# EAGLE board interface_board (EAGLE 6.3)
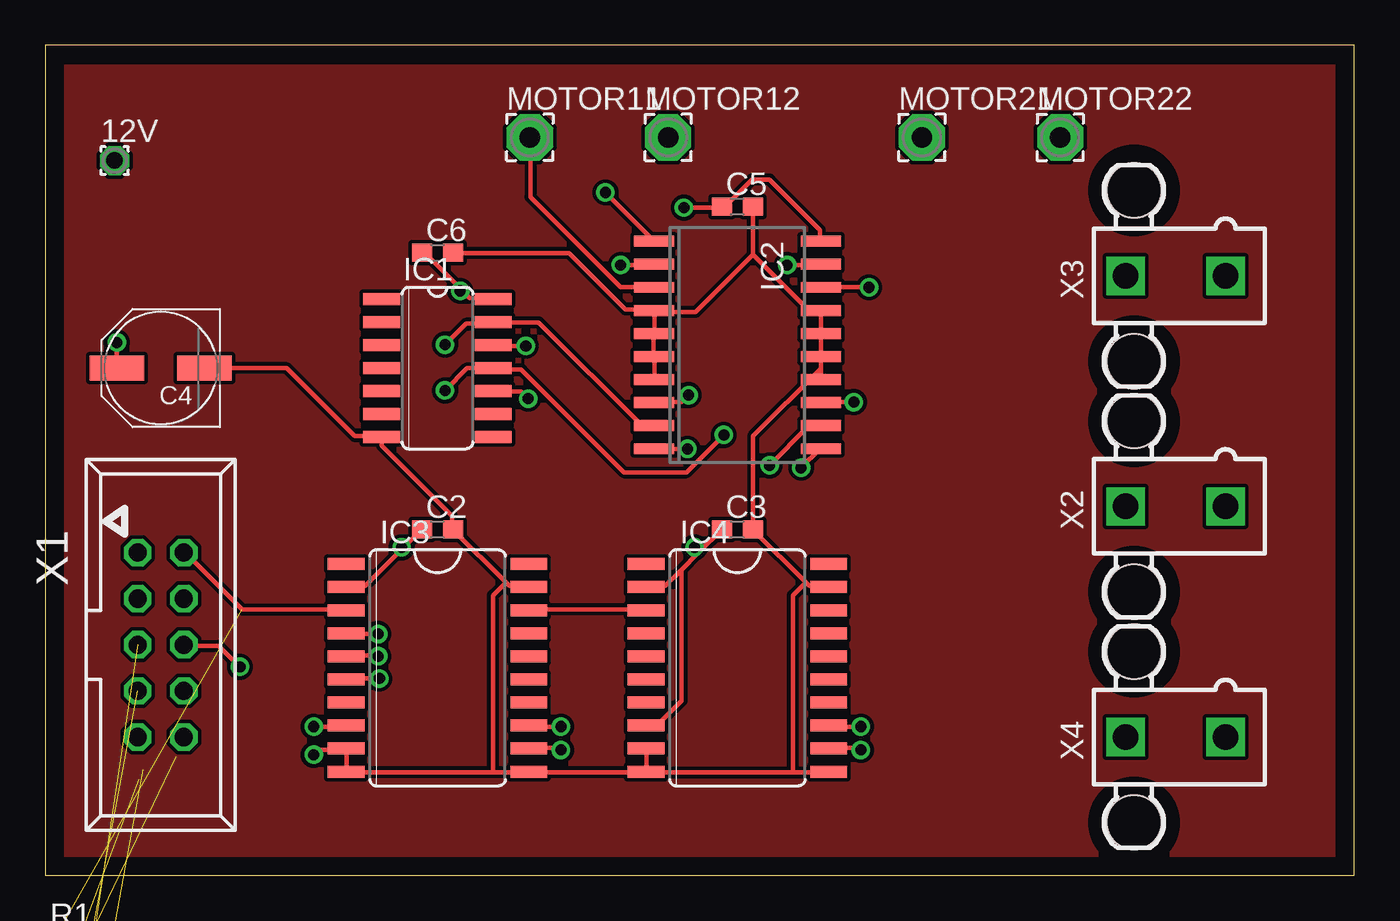
[diagram p0: board, top side]
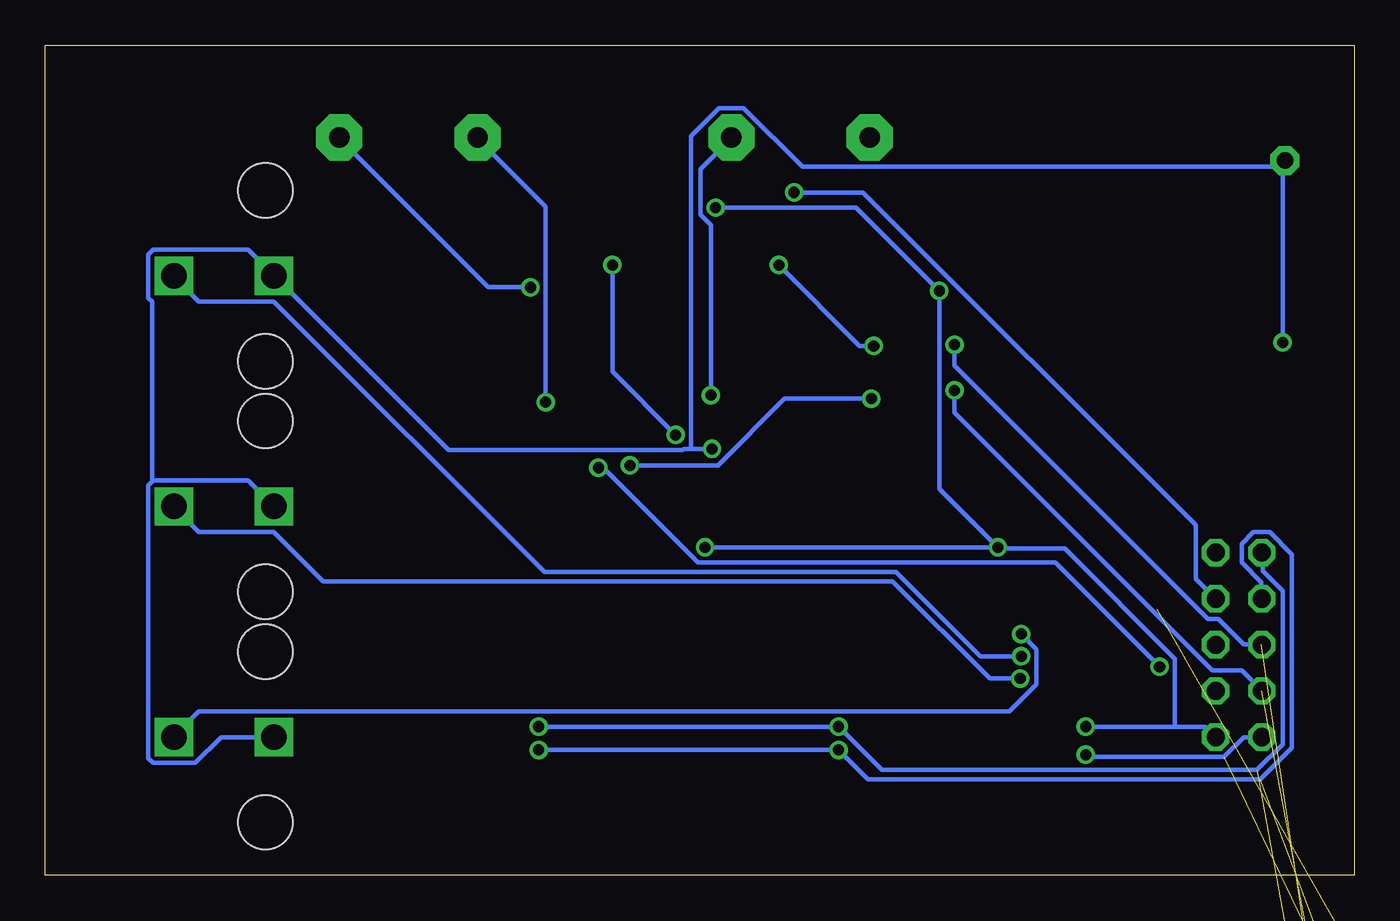
[diagram p1: board, bottom side, seen from below]

Size 72.06 x 45.71 mm. Coordinates in mm from the lower left corner, seen from the top.
Outline: 0,0 72.06,0 72.06,45.71 0,45.71 0,0
Copper layers (1*16): Top 0.035mm / dielectric 1.5mm / Bottom 0.035mm
Design rules "default": minimum track width 10mil, minimum drill 24mil, track to track 8mil, track to pad 8mil, pad to pad 8mil, via to via 8mil, smd to smd 8mil, copper to edge 40mil, drill to drill 8mil, minimum pad ring 10mil, minimum via ring 8mil, stop-mask expansion 4mil, vias tented up to drill 0mil, thermal gap 10mil

## Footprints (pad centres in the part's own frame; a part is rotated, then mirrored left to right if it is on the bottom)
1,6/0,9 = drill 0.914 pad 1.6 octagon: 1 0,0
C0603 = smd 1.1 x 1: 1 -0.85,0; 2 0.85,0
PANASONIC_D = smd 3 x 1.4: + 2.4,0; - -2.4,0
SO14 = smd 0.66 x 2.032: 1 -3.81,-3.073; 2 -2.54,-3.073; 3 -1.27,-3.073; 4 0,-3.073; 5 1.27,-3.073; 6 2.54,-3.073; 7 3.81,-3.073; 8 3.81,3.073; 9 2.54,3.073; 10 1.27,3.073; 11 0,3.073; 12 -1.27,3.073; 13 -2.54,3.073; 14 -3.81,3.073
SO20 = smd 0.6 x 2.2: 1 -5.715,-4.6; 2 -4.445,-4.6; 3 -3.175,-4.6; 4 -1.905,-4.6; 5 -0.635,-4.6; 6 0.635,-4.6; 7 1.905,-4.6; 8 3.175,-4.6; 9 4.445,-4.6; 10 5.715,-4.6; 11 5.715,4.6; 12 4.445,4.6; 13 3.175,4.6; 14 1.905,4.6; 15 0.635,4.6; 16 -0.635,4.6; 17 -1.905,4.6; 18 -3.175,4.6; 19 -4.445,4.6; 20 -5.715,4.6
SO20W = smd 0.66 x 2.032: 1 -5.715,-5.029; 2 -4.445,-5.029; 3 -3.175,-5.029; 4 -1.905,-5.029; 5 -0.635,-5.029; 6 0.635,-5.029; 7 1.905,-5.029; 8 3.175,-5.029; 9 4.445,-5.029; 10 5.715,-5.029; 11 5.715,5.029; 12 4.445,5.029; 13 3.175,5.029; 14 1.905,5.029; 15 0.635,5.029; 16 -0.635,5.029; 17 -1.905,5.029; 18 -3.175,5.029; 19 -4.445,5.029; 20 -5.715,5.029
2,54/1,1 = drill 1.118 pad 2.54 octagon: 1 0,0
M0805 = smd 1.3 x 1.6: 1 -0.95,0; 2 0.95,0
057-010-1 = drill 1 octagon: 1 -5.08,-1.27; 2 -5.08,1.27; 3 -2.54,-1.27; 4 -2.54,1.27; 5 0,-1.27; 6 0,1.27; 7 2.54,-1.27; 8 2.54,1.27; 9 5.08,-1.27; 10 5.08,1.27
5566-2 = drill 1.4 square: 1 0,-2.75; 2 0,2.75 | hole 3: 4.7,2.29; -4.7,2.29

## Placement (x,y rotation side)
12V  [1,6/0,9]  3.81,39.37 0 top
C2  100nF  [C0603]  21.59,19.05 0 top
C3  100nF  [C0603]  38.1,19.05 0 top
C4  100uF  [PANASONIC_D]  6.35,27.94 180 top
C5  100nF  [C0603]  38.1,36.83 0 top
C6  100nF  [C0603]  21.59,34.29 0 top
IC1  74HCT14D  [SO14]  21.59,27.94 270 top
IC2  L293DD  [SO20]  38.1,29.21 270 top
IC3  TPIC6B596DW  [SO20W]  21.59,11.43 270 top
IC4  TPIC6B596DW  [SO20W]  38.1,11.43 270 top
MOTOR11  [2,54/1,1]  26.67,40.64 0 top
MOTOR12  [2,54/1,1]  34.29,40.64 0 top
MOTOR21  [2,54/1,1]  48.26,40.64 0 top
MOTOR22  [2,54/1,1]  55.88,40.64 0 top
R1  10k  [M0805]  1.27,-3.81 0 top  (outside the outline)
R2  10k  [M0805]  1.27,-7.62 0 top  (outside the outline)
R3  10k  [M0805]  1.27,-11.43 0 top  (outside the outline)
R4  10k  [M0805]  1.27,-15.24 0 top  (outside the outline)
R5  10k  [M0805]  1.27,-19.05 0 top  (outside the outline)
X1  057-010-1  [057-010-1]  6.35,12.7 270 top
X2  5566-2  [5566-2]  62.23,20.32 90 top
X3  5566-2  [5566-2]  62.23,33.02 90 top
X4  5566-2  [5566-2]  62.23,7.62 90 top

## Library data of the parts
12V MOTOR11 MOTOR12 MOTOR21 MOTOR22 = wirepad
C2-C6 = rcl
IC1 = 74xx-eu
IC2 = st-microelectronics; OC_FARNELL: unknown
IC3 IC4 = tpic
R1-R5 = resistor
X1 = con-panduit; OC_FARNELL: unknown; OC_NEWARK: unknown
X2-X4 = con-molex; OC_FARNELL: 1822072; OC_NEWARK: unknown

## Nets
+5V: C2.1 C3.1 C5.1 C6.1 IC1.14 IC2.20 IC3.2 IC3.8 IC4.2 IC4.8 X1.10
+12V: 12V.1 C4.+ IC2.10 X2.2 X3.2 X4.2
GND: C2.2 C3.2 C4.- C5.2 C6.2 IC1.7 IC2.4 IC2.5 IC2.6 IC2.7 IC2.14 IC2.15 IC2.16 IC2.17 IC3.9 IC3.10 IC3.11 IC3.19 IC4.9 IC4.10 IC4.11 IC4.19 R1.2 R2.2 R3.1 R4.2 R5.2 X1.9
N$1: IC1.13 IC2.9 R5.1 X1.5
N$2: IC3.4 X4.1
N$3: IC2.18 MOTOR22.1
N$5: IC2.1 X1.4
N$6: IC2.11 X1.6
N$7: IC2.13 MOTOR21.1
N$8: IC1.12 IC2.2
N$9: IC1.10 IC2.12
N$10: IC2.8 MOTOR12.1
N$11: IC3.5 X3.1
N$12: IC2.3 MOTOR11.1
N$13: IC3.6 X2.1
N$14: IC1.11 IC2.19 R4.1 X1.7
N$15: IC3.18 IC4.3
N$16: IC3.3 R1.1 X1.2
N$18: IC3.12 IC4.12 R2.1 X1.3
N$19: IC3.13 IC4.13 R3.2 X1.1

## Tracks (layer width: path | path; a pad name or v marks a point on that pad's centre or on a via)
+5V  (via drill 0.61)
  Top 0.254: 34.97,16.77 34.13,15.94 33.1,15.94 IC4.2 | 34.97,16.77 36,17.81 | 36,17.81 37.23,19.03 C3.1 | IC4.8 33.1,8.26 33.68,8.26 35.03,9.61 35.03,16.71 34.97,16.77 | v14.77,8.19 16.52,8.19 IC3.8 | IC2.20 42.65,34.97 42.65,35.55 39.87,38.32 38.9,38.32 37.42,36.84 37.29,36.84 C5.1 37.16,36.77 v35.16,36.77 | 22.9,32.26 23.36,31.81 24.64,31.81 IC1.14 | 22.9,32.26 20.9,34.26 20.77,34.26 C6.1 | 19.68,18 17.61,15.94 16.58,15.94 IC3.2 | 19.68,18 20.71,19.03 C2.1 | v22.84,32.19 22.9,32.26 | v19.61,18.06 19.68,18 | v35.74,18.06 35.94,17.87 36,17.81
  Bottom 0.254: 9.87,8.19 8.19,8.19 X1.10 | 9.87,8.19 v14.77,8.19 | v19.61,18.06 22.84,21.29 v22.84,32.19 22.9,32.26 27.42,36.77 v35.16,36.77 | 9.87,8.19 9.87,11.94 15.94,18 19.55,18 v19.61,18.06 | v19.61,18.06 v35.74,18.06
+12V  (via drill 0.61)
  Top 0.254: v3.94,29.36 3.94,28 C4.+ | v35.35,23.48 33.55,23.48 IC2.10
  Bottom 0.254: 66.13,21.74 66.39,21.48 66.39,6.45 66.13,6.19 63.81,6.19 62.39,7.61 X4.2 | 66.13,21.74 60.9,21.74 X2.2 | v3.94,29.36 3.94,39.29 3.87,39.35 12V.1 4,39.03 30.39,39.03 33.61,42.26 34.97,42.26 36.52,40.71 36.52,23.48 | 36.52,23.48 36.9,23.48 36.97,23.42 49.87,23.42 59.42,32.97 X3.2 59.55,33.1 60.9,34.45 66.13,34.45 66.39,34.19 66.39,31.81 66.19,31.61 66.19,21.81 66.13,21.74 | 36.52,23.48 v35.35,23.48
GND  (via drill 0.61)  (5 unrouted)
  Top 0.254: 33.55,27.29 IC2.7 33.55,27.42 33.55,28.52 IC2.6 | 33.55,28.58 IC2.6 | 33.55,29.87 IC2.5 | C6.2 22.45,34.26 28.84,34.26 31.93,31.16 33.48,31.16 IC2.4 | IC2.5 33.55,30 33.55,31.03 IC2.4 | IC2.6 33.48,28.64 33.48,29.74 IC2.5 | 41.87,16.13 42.06,15.94 43.1,15.94 IC4.19 | 41.87,16.13 38.97,19.03 C3.2 38.97,19.16 38.97,24.19 42.65,27.87 42.71,27.87 | IC2.14 42.71,27.42 42.71,27.87 | 42.71,27.87 42.71,28.52 IC2.15 | IC2.15 | 42.71,29.87 IC2.16 | 38.97,34.19 38.97,36.77 C5.2 | 38.97,34.19 42,31.16 42.65,31.16 IC2.17 | IC2.16 42.71,30 42.71,31.03 IC2.17 | 42.71,31.1 IC2.17 | IC2.15 42.71,28.71 42.71,29.74 IC2.16 | 38.97,34.19 35.81,31.03 33.68,31.03 IC2.4 | IC1.7 | 25.36,16.13 25.55,15.94 26.58,15.94 IC3.19 | 25.36,16.13 22.45,19.03 C2.2 22.39,19.16 22.39,19.81 18.52,23.68 18.52,24 IC1.7 | C4.- 8.77,27.93 13.29,27.93 17.03,24.19 18.45,24.19 IC1.7 | IC4.10 33.03,5.68 26.64,5.68 IC3.11 26.52,5.68 24.64,5.68 | IC4.9 33.1,6.97 33.1,5.81 IC4.10 | 41.16,5.68 33.16,5.68 IC4.10 | 41.16,5.68 43.1,5.68 IC4.11 | 24.64,5.68 16.64,5.68 IC3.10 16.58,5.74 16.58,6.97 IC3.9 16.52,6.9 15.03,6.9 v14.77,6.64 | 24.64,5.68 24.64,15.42 25.29,16.06 25.36,16.13 | 41.16,5.68 41.16,15.42 41.81,16.06 41.87,16.13
  Bottom 0.254: v14.77,6.64 14.64,6.52 7.16,6.52 6.07,7.61 5.1,7.61 X1.9
N$1  (via drill 0.61)  (1 unrouted)
  Top 0.254: IC2.9 33.48,24.77 32.84,24.77 27.16,30.45 24.71,30.45 IC1.13 24.58,30.39 23.16,30.39 v22,29.23
  Bottom 0.254: v22,29.23 22,28.06 8.06,14.13 7.48,14.13 6.07,12.71 5.1,12.71 X1.5
N$2  (via drill 0.61)
  Top 0.254: v18.32,13.29 16.58,13.29 IC3.4
  Bottom 0.254: v18.32,13.29 17.48,12.45 17.48,10.52 18.97,9.03 63.61,9.03 64.97,7.68 X4.1
N$3  (via drill 0.61)
  Top 0.254: v45.35,32.39 IC2.18
  Bottom 0.254: v45.35,32.39 47.68,32.39 55.87,40.58 MOTOR22.1
N$4
  pour Top: 0,44.45 71.12,44.45 71.12,0 0,0
N$5  (via drill 0.61)
  Top 0.254: v30.84,37.61 33.48,34.97 IC2.1
  Bottom 0.254: v30.84,37.61 27.03,37.61 8.71,19.29 8.71,16.32 7.68,15.29 X1.4
N$6  (via drill 0.61)
  Top 0.254: v41.61,22.45 42.65,23.48 IC2.11 | v10.71,11.48 9.55,12.64 7.68,12.64 X1.6
  Bottom 0.254: v41.61,22.45 41.35,22.45 36.13,17.23 16.45,17.23 v10.71,11.48
N$7  (via drill 0.61)
  Top 0.254: v44.52,26.06 42.71,26.06 IC2.13
  Bottom 0.254: v44.52,26.06 44.52,36.84 48.26,40.58 MOTOR21.1
N$8  (via drill 0.61)
  Top 0.254: v26.45,29.16 24.71,29.16 IC1.12 | v31.68,33.61 33.48,33.61 IC2.2
  Bottom 0.254: v26.45,29.16 27.23,29.16 v31.68,33.61
N$9  (via drill 0.61)
  Top 0.254: v26.58,26.26 26.19,26.64 24.71,26.64 IC1.10 | v39.87,22.58 42,24.71 42.65,24.71 IC2.12
  Bottom 0.254: v26.58,26.26 31.36,26.26 35.03,22.58 v39.87,22.58
N$10  (via drill 0.61)
  Top 0.254: v35.42,26.45 35.03,26.06 33.55,26.06 IC2.8
  Bottom 0.254: v35.42,26.45 35.42,35.81 36,36.39 36,38.9 34.32,40.58 MOTOR12.1
N$11  (via drill 0.61)
  Top 0.254: v18.32,12.06 18.26,12.13 16.58,12.13 IC3.5
  Bottom 0.254: v18.32,12.06 20.58,12.06 25.23,16.71 44.58,16.71 59.48,31.61 63.61,31.61 64.97,32.97 X3.1
N$12
  Top 0.254: IC2.3 33.48,32.39 31.68,32.39 26.71,37.35 26.71,40.58 MOTOR11.1
N$13  (via drill 0.61)
  Top 0.254: v18.39,10.84 16.58,10.84 IC3.6
  Bottom 0.254: v18.39,10.84 20.06,10.84 25.42,16.19 56.77,16.19 59.48,18.9 63.61,18.9 64.97,20.26 X2.1
N$14  (via drill 0.61)  (1 unrouted)
  Top 0.254: v22,26.71 23.23,27.93 24.64,27.93 IC1.11 24.71,27.87 26.19,27.87 31.87,22.19 35.29,22.19 v37.35,24.26 | v40.84,33.61 42.65,33.61 IC2.19
  Bottom 0.254: v22,26.71 22,25.48 7.81,11.29 6.19,11.29 5.1,10.19 X1.7 | v40.84,33.61 40.84,27.74 v37.35,24.26
N$15
  Top 0.254: IC3.18 26.64,14.64 33.03,14.64 IC4.3
N$16  (1 unrouted)
  Top 0.254: IC3.3 16.52,14.64 10.84,14.64 7.68,17.81 X1.2
N$18  (via drill 0.61)  (1 unrouted)
  Top 0.254: v28.39,6.9 28.26,7.03 26.64,7.03 IC3.12 | v44.9,6.9 44.77,7.03 43.16,7.03 IC4.12
  Bottom 0.254: v44.9,6.9 v28.39,6.9 26.77,5.29 5.16,5.29 3.42,7.03 3.42,17.68 4.64,18.9 5.55,18.9 6.19,18.26 6.19,17.23 5.1,16.13 5.1,15.29 X1.3
N$19  (via drill 0.61)  (1 unrouted)
  Top 0.254: v28.39,8.19 26.64,8.19 IC3.13 | v44.9,8.19 43.16,8.19 IC4.13
  Bottom 0.254: v44.9,8.19 v28.39,8.19 28.32,8.13 26,5.81 5.36,5.81 3.94,7.23 3.94,15.68 5.03,16.77 5.03,17.74 X1.1